# Altium PCB Dc-Dc Converters.PcbDoc
Units mil, origin at the board's own origin, x right, y up, seen from the top; angles counter-clockwise.
Board outline 3935.26 x 1377.95 mil, 4 copper layers (Top Layer, GND, Vin/Vout, Bottom Layer), stack 23.756 mil thick; 30 components, 12 nets, 70 pads, 91 vias.
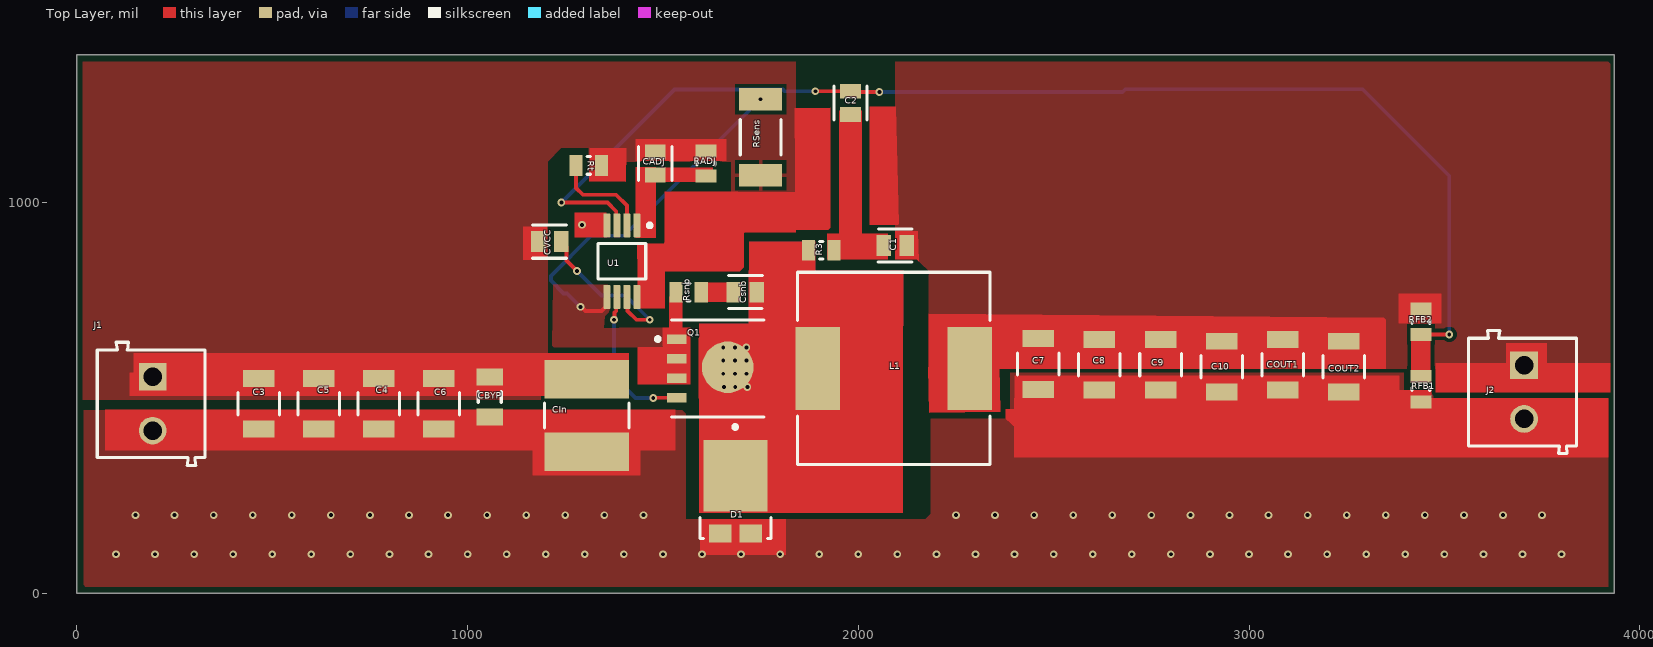
[diagram p0: Top Layer view]
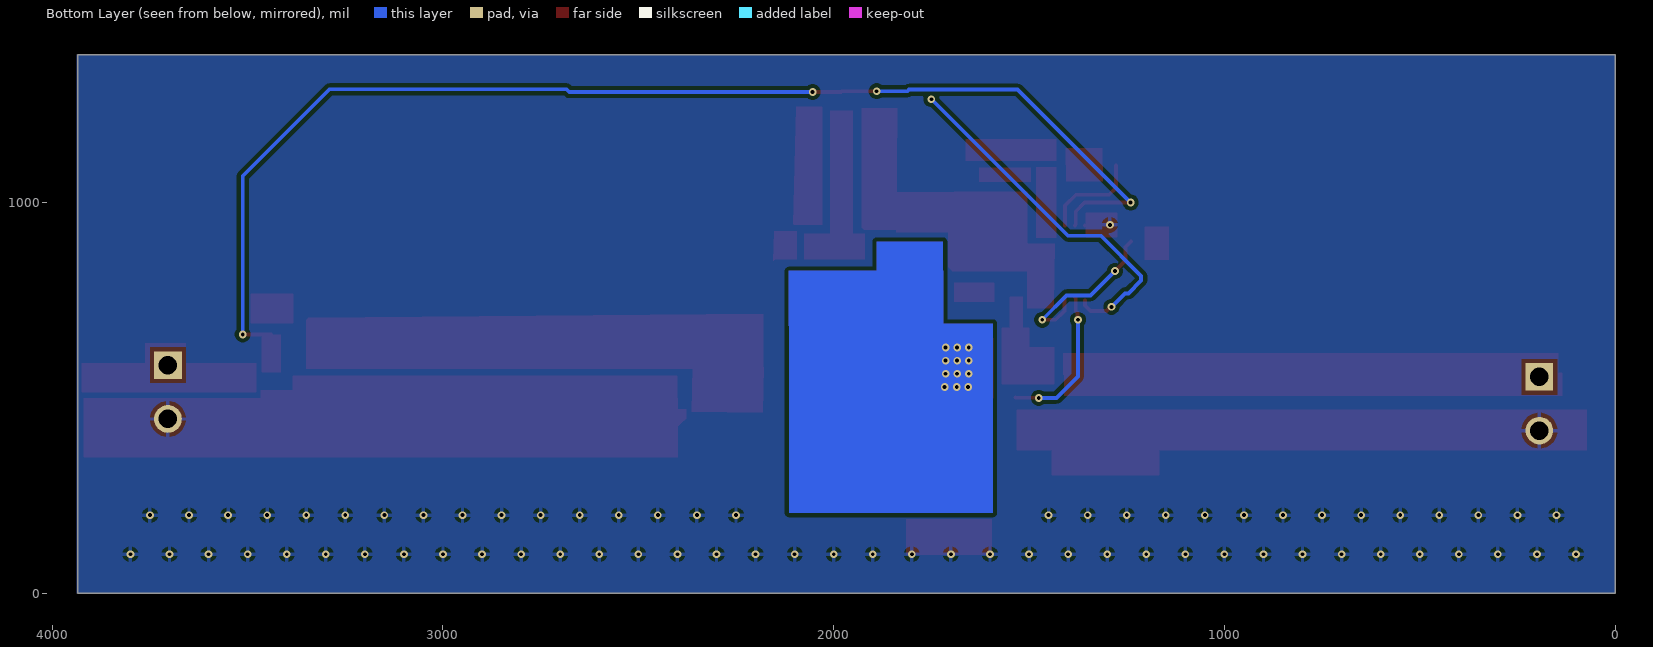
[diagram p1: Bottom Layer view, seen from below]
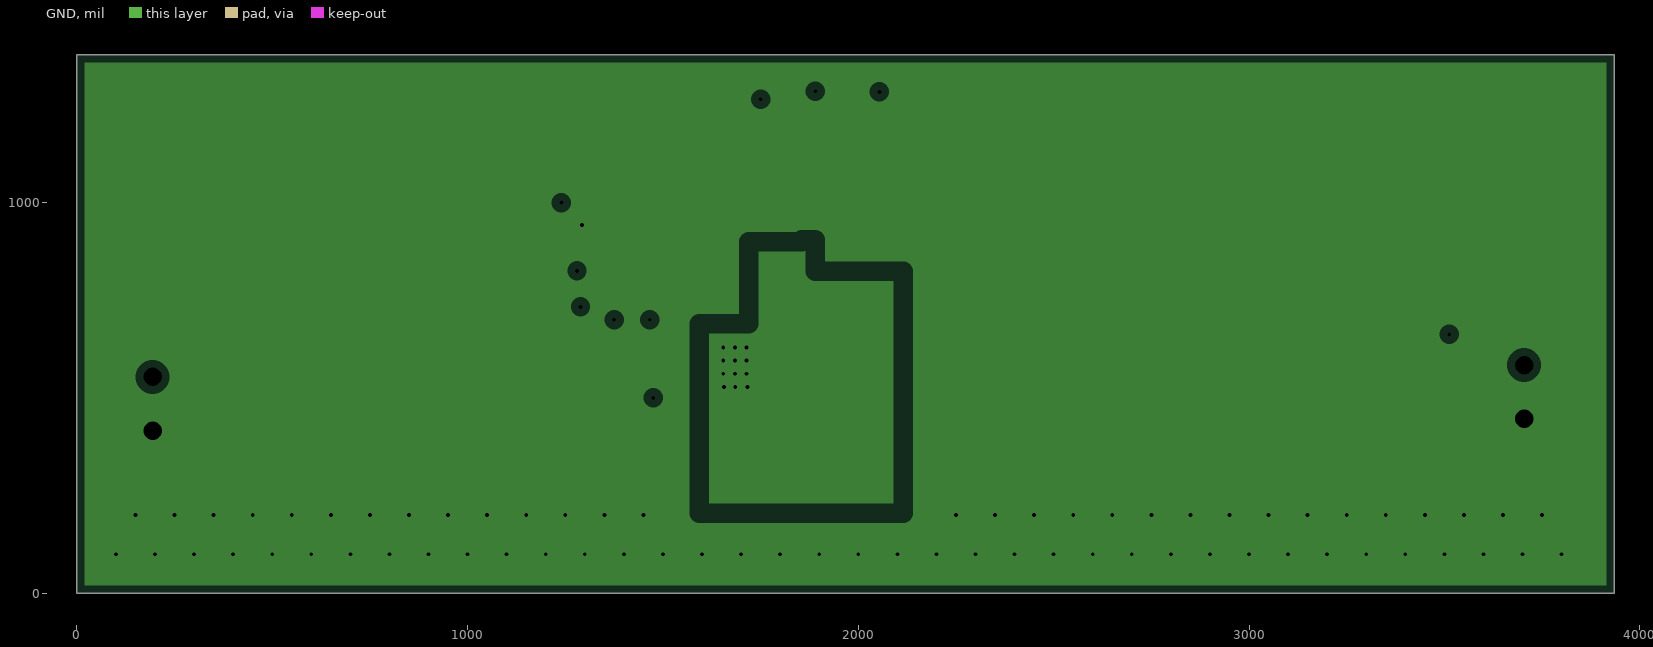
[diagram p2: GND, clearances drawn from the general rule]
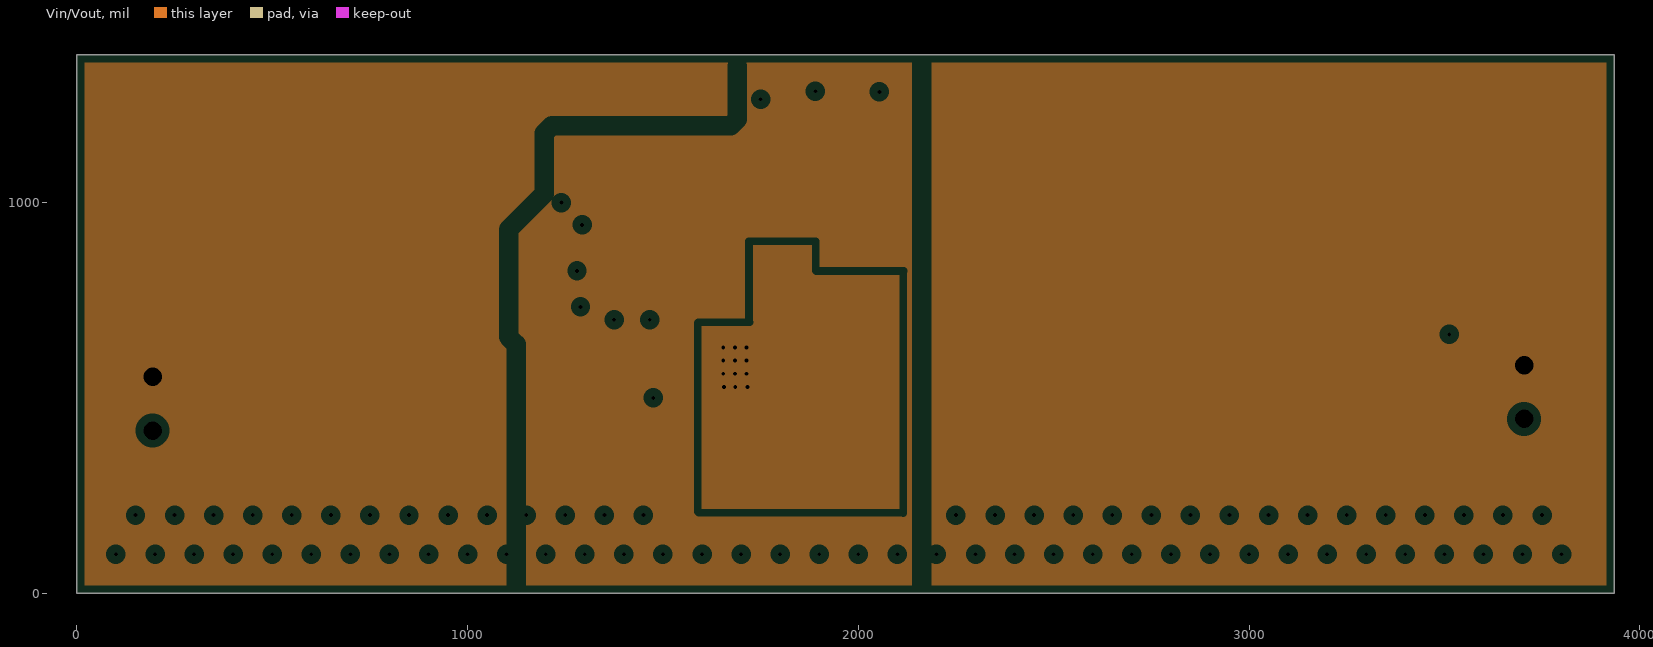
[diagram p3: Vin/Vout, clearances drawn from the general rule]
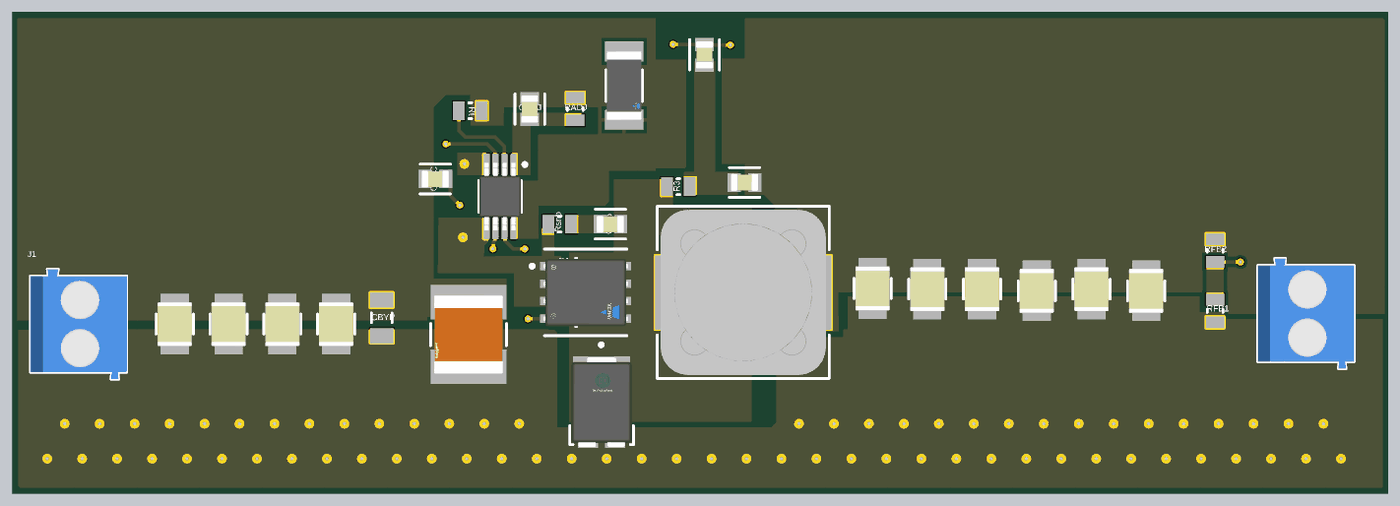
[diagram p4: 3D render of the assembled board from above, using the file's embedded part models]

## Layer stack, top to bottom
Top Solder: solder mask 0.4, Solder Resist, Dk 3.5
Top Layer: signal copper 1.4
Dielectric 2: prepreg 2.8, PP-006, Dk 4.1
GND: plane copper 1.378, net GND
Dielectric 1: dielectric 12.6, FR-4, Dk 4.8
Vin/Vout: plane copper 1.378, net (Multiple Nets)
Dielectric 3: prepreg 2.8, PP-006, Dk 4.1
Bottom Layer: signal copper 1.4
Bottom Solder: solder mask 0.4, Solder Resist, Dk 3.5

## Board outline
0,0 3935.26,0 3935.26,1377.95 0,1377.95

## Design rules (kind name [scope] priority, off if disabled: settings)
Clearance [All] p1: gap=10 ignorepadtopadclearanceinfootprint=TRUE except(0: Arc-Hole Track-Hole SMDPad-Hole THPad-Hole Via-Hole Fill-Hole Poly-Hole Region-Hole Text-Hole)
PlaneClearance [All] p1: clearance=20
PlaneConnect [All] p1: planeconnectstyle=Relief reliefexpansion=20 reliefentries=4 reliefconductorwidth=10 reliefairgap=10
PolygonConnect PolygonConnect_2 [All vs IsNamedPolygon('GND_L01_P005')] p1: connectstyle=Direct reliefconductorwidth=10 reliefentries=4 polygonreliefangle="90 Angle" airgapwidth=10
PolygonConnect PolygonConnect_1 [All vs IsNamedPolygon('NETQ1_1_L01_P007')] p2: connectstyle=Direct reliefconductorwidth=10 reliefentries=4 polygonreliefangle="90 Angle" airgapwidth=10
PolygonConnect [All] p3: connectstyle=Relief reliefconductorwidth=10 reliefentries=4 polygonreliefangle="90 Angle" airgapwidth=10
RoutingVias [All] p1: holewidth=9.84 width=19.68 viastyle="Through Hole" minholewidth=9.84 minwidth=19.68 maxholewidth=9.84 maxwidth=19.68
SilkToSilkClearance [All] p1 off: silktosilkclearance=10
SilkToSolderMaskClearance [IsPad] p1 off: minsilkscreentomaskgap=10 clearancetoexposedcopper=TRUE
SolderMaskExpansion [All] p1: expansion=4 istentingtop=FALSE
UnRoutedNet [All] p1: checkbadconnections=TRUE
Width [All] p1: maxlimit=10 minlimit=10 preferedwidth=10
25 further rules are at their usual default settings.

## Components (designator, comment, footprint, x,y, rotation, side; value= is the part's Value field where it differs from the comment)
C1 "3300pF" FP-C0805C-DG-MFG 2094.53,890.08 r0 top value=1000pF
C2 "0.1uF" FP-C0805C-DG-MFG 1980,1255 r270 top value=1000pF
C3 ".22uF" FP-GRM32-0_3-MFG 465,485 r270 top value=100uF
C4 ".22uF" FP-GRM32-0_3-MFG 772.63,485 r270 top value=100uF
C5 ".22uF" FP-GRM32-0_3-MFG 618.81,485 r270 top value=100uF
C6 ".22uF" FP-GRM32-0_3-MFG 926.44,485 r270 top value=100uF
C7 "100uF" FP-GRM32-0_3-MFG 2460.63,586.93 r270 top
C8 "100uF" FP-GRM32-0_3-MFG 2617.07,585 r270 top
C9 "100uF" FP-GRM32-0_3-MFG 2773.52,585 r270 top
C10 "100uf" FP-GRM32-0_3-MFG 2929.96,580 r270 top value=100uF
CADJ "1000pF" FP-C0805C-DG-MFG 1480,1100 r90 top
CBYP "C1206C105K5RACTU" CAPC3216X110X50LL20T25 1056.7,502.65 r90 top
CIn "68uF" FP-GRM55D-0_4-IPC_A 1305,455 r270 top
COUT1 "C3225X5R0J476M250AA" FP-GRM32-0_3-MFG 3086.4,585 r270 top value=47uF
COUT2 "C3225X5R0J476M250AA" FP-GRM32-0_3-MFG 3242.85,580 r270 top value=47uF
Csnb "1000pF" FP-C0805C-DG-MFG 1710.63,770.63 r180 top
CVCC "0.47uF" FP-C0805C-DG-MFG 1210,900 r0 top
D1 "MBR1560STR" FP-340BQ-MFG 1685.63,261.26 r270 top value=550pF
J1 "691103110002" 691103110002 190,485 r270 top
J2 "691103110002" 691103110002 3700,515 r270 top
L1 "7447709150" WE-PD-XXL 2090.63,575.63 r0 top
Q1 "SI7465DP-T1-E3" FP-S17-0173-SINGLE-MFG 1640.22,575.63 r0 top
R3 "23.2k" RESC2013X50X30LL20T20 1905,877.96 r180 top
RADJ "2.1k" RESC2013X50X30LL20T20 1610,1100 r270 top
RFB1 "3.4k" RESC2013X50X30LL20T20 3440,522.52 r90 top
RFB2 "10k" RESC2013X50X30LL20T20 3440,695 r270 top
RSens "0.01" FP-CRCW2010-e3-MFG 1750,1167 r270 top
Rsnb "10" RESC2013X50X30LL20T20 1565.63,770.63 r0 top
Rt "91k" RESC2013X50X30LL20T20 1310,1095 r0 top
U1 "LM25085MME/NOPB" DGK0008A_M 1395,850 r270 top

## Footprints (in the part's own frame and the unit in brackets; to place one, negate y for a bottom-side part, rotate by r counter-clockwise, add the part's x,y. Pads: shape width x height; smd on the part's side, far side on the other; paste and mask are expansions set on the pad)
691103110002 [mm] "3,50mm - modular - blue - Horizontal wire entry - Pressure clamp - 8,4mm height - 02p"
  rect 1.8x1.8 hole 1.2: 1(-1.75,0.1)
  round 1.8 hole 1.2: 2(1.75,0.1)
  silkscreen extent -4,-3.5 4,3.5, body extent -4,-3.5 4,3.5, height 8.45
CAPC3216X110X50LL20T25 [mm] "Chip Capacitor, 2-Leads, Body 3.20x1.60mm, IPC High Density"
  rect 1.1x1.7 smd: 1(-1.3,0) 2(1.3,0)
  silkscreen extent -0.35,-0.75 0.35,0.75, body extent -1.7,-0.9 1.7,0.9, height 1.1
DGK0008A_M [mm] "TSOP, 8-Leads, Body 3.1x3.1mm, Pitch 0.65mm, IPC Low Density"
  rrect22% 1.55x0.45 smd: 1(-2.325,0.975) 2(-2.325,0.325) 3(-2.325,-0.325) 4(-2.325,-0.975) 5(2.325,-0.975) 6(2.325,-0.325) 7(2.325,0.325) 8(2.325,0.975)
  silkscreen extent -2.45,-1.55 1.15,1.92, body extent -2.45,-1.5 2.45,1.5, height 0.94
FP-340BQ-MFG [mm]
  rect 1.15x1.45 smd paste+0 mask+0: 1(2.75,0.985) 2(2.75,-0.985)
  rect 4.65x4.15 smd paste+0 mask+0: 3(-1,0)
  silkscreen extent -4.3,-2.31 3.08,2.31, body extent -3.42,-2.41 3.42,2.41, height 0.25
FP-C0805C-DG-MFG [mm]
  rect 0.95x1.35 smd paste+0 mask+0: 1(-0.75,0) 2(0.75,0)
  silkscreen extent -1.11,-1.08 1.1,1.07, body extent -1.4,-0.85 1.4,0.85, height 0.25
FP-CRCW2010-e3-MFG [mm]
  rect 1.45x2.8 smd paste+0 mask+0: 1(-2.475,0) 2(2.475,0)
  silkscreen extent -1.14,-1.33 1.14,1.33, body extent -3.3,-1.5 3.3,1.5, height 0.25
FP-GRM32-0_3-MFG [mm]
  rect 1.1x2.05 smd paste+0 mask+0: 1(-1.65,0) 2(1.65,0)
  silkscreen extent -0.72,-1.35 0.72,1.35, body extent -2.3,-1.45 2.3,1.45, height 0.25
FP-GRM55D-0_4-IPC_A [mil]
  rect 98.51x216.66 smd paste+0 mask+0: 1(-92.54,0) 2(92.54,0)
  silkscreen extent -31,-108 31,108, body extent -161,-128 161,128, height 10
FP-S17-0173-SINGLE-MFG [mm]
  rect 1.27x0.61 smd paste+0 mask+0: 1(-2.67,1.905) 2(-2.67,0.635) 3(-2.67,-0.635) 4(-2.67,-1.905)
  round 3.356 smd paste+0 mask+0: 5-6-7-8(0.645,0.069)
  Top Layer region: -1.219,1.956 2.286,1.956 2.286,2.21 3.302,2.21 3.302,1.6 2.591,1.6 2.591,0.94 3.302,0.94 3.302,0.33 2.591,0.33 2.591,-0.33 3.302,-0.33 3.302,-0.94 2.591,-0.94 2.591,-1.6 3.302,-1.6 3.302,-2.21 2.286,-2.21 2.286,-1.956 -1.219,-1.956
  silkscreen extent -4.02,-3.15 3,3.15, body extent -3.4,-2.73 3.4,2.73, height 0.25
RESC2013X50X30LL20T20 [mm] "Chip Resistor, 2-Leads, Body 2.00x1.25mm, IPC High Density"
  rect 0.85x1.35 smd: 1(-0.825,0) 2(0.825,0)
  silkscreen extent -0.1,-0.58 0.1,0.58, body extent -1.1,-0.72 1.1,0.72, height 0.5
WE-PD-XXL [mm] "SMD Inductor, 2-Leads, Body 12.0 x 12.0 mm"
  rect 2.9x5.4 smd: 1(-4.95,0) 2(4.95,0)
  silkscreen extent -6.25,-6.25 6.25,6.25, body extent -6,-6 6,6, height 10.36

## Part data
C1 C2: library part CMP-2007-03243-2, "CAP CER 10UF 10V X5R 0805", 3DS Part Number=220-00001, Capacitance=1000pF, Manufacturer=Kemet, Manufacturer Part Number=C0805C106K8PACTU, Package=C0805C-DG, Temperature="-55°C to +85°C", Temperature Characteristic=X5R, Temperature Coefficient=15%, Temperature Range High=+85°C, Temperature Range Low=-55°C, Tolerance=10%, Voltage=10V, Automotive=No, Category=Cap, ComponentLink2Description=Datasheet, ComponentLink2URL=https://content.kemet.com/datasheets/KEM_C1006_X5R_SMD.pdf, Device Class L1="Passive Components", Device Class L2=Capacitors, Device Class L3="Ceramic Capacitors", Digikey Description="CAP CER 10UF 10V X5R 0805", Height=1.4mm, Ipc Land Pattern Name=CAPC200125X125, Lead Free=Yes, Material=Ceramic, Mouser Description="CAP CER 10UF 10V X5R 0805", Octopart=https://octopart.com/c0805c106k8pactu-kemet-98697, RoHS=TRUE, Voltage Rating=10V
C3 C4 C5 C6 C10: library part CMP-2000-05259-2, "CAP CER 100UF 6.3V X5R 1210", 3DS Part Number=220-00002, Capacitance=100uF, Manufacturer=Murata, Manufacturer Part Number=GRM32ER60J107ME20L, Package=GRM32-0.3, Temperature="-55°C to +85°C", Temperature Characteristic=X5R, Temperature Coefficient=15%, Temperature Range High=+85°C, Temperature Range Low=-55°C, Tolerance=20%, Voltage=6.3V, Automotive=No, Category=Cap, ComponentLink2Description=Datasheet, ComponentLink2URL=https://search.murata.co.jp/Ceramy/image/img/A01X/G101/ENG/GRM32ER60J107ME20-01.pdf, Device Class L1="Passive Components", Device Class L2=Capacitors, Device Class L3="Ceramic Capacitors", Digikey Description="CAP CER 100UF 6.3V X5R 1210", Height=2.7mm, Ipc Land Pattern Name=CAPC320250X250, Lead Free=Yes, Material=Ceramic, Octopart=https://octopart.com/grm32er60j107me20l-murata-197007, RoHS=TRUE, Voltage Rating=6.3V
C7 C8 C9: library part CMP-2000-05259-2, "CAP CER 100UF 6.3V X5R 1210", 3DS Part Number=220-00002, Manufacturer=Murata, Manufacturer Part Number=GRM32ER60J107ME20L, Package=GRM32-0.3, Temperature="-55°C to +85°C", Temperature Characteristic=X5R, Temperature Coefficient=15%, Temperature Range High=+85°C, Temperature Range Low=-55°C, Tolerance=20%, Voltage=6.3V, Automotive=No, Capacitance=100uF, Category=Cap, ComponentLink2Description=Datasheet, ComponentLink2URL=https://search.murata.co.jp/Ceramy/image/img/A01X/G101/ENG/GRM32ER60J107ME20-01.pdf, Device Class L1="Passive Components", Device Class L2=Capacitors, Device Class L3="Ceramic Capacitors", Digikey Description="CAP CER 100UF 6.3V X5R 1210", Height=2.7mm, Ipc Land Pattern Name=CAPC320250X250, Lead Free=Yes, Material=Ceramic, Octopart=https://octopart.com/grm32er60j107me20l-murata-197007, RoHS=TRUE, Voltage Rating=6.3V
CADJ Csnb CVCC: library part CMP-2007-03243-2, "CAP CER 10UF 10V X5R 0805", 3DS Part Number=220-00001, Manufacturer=Kemet, Manufacturer Part Number=C0805C106K8PACTU, Package=C0805C-DG, Temperature="-55°C to +85°C", Temperature Characteristic=X5R, Temperature Coefficient=15%, Temperature Range High=+85°C, Temperature Range Low=-55°C, Tolerance=10%, Voltage=10V, Automotive=No, Category=Cap, ComponentLink2Description=Datasheet, ComponentLink2URL=https://content.kemet.com/datasheets/KEM_C1006_X5R_SMD.pdf, Device Class L1="Passive Components", Device Class L2=Capacitors, Device Class L3="Ceramic Capacitors", Digikey Description="CAP CER 10UF 10V X5R 0805", Height=1.4mm, Ipc Land Pattern Name=CAPC200125X125, Lead Free=Yes, Material=Ceramic, Mouser Description="CAP CER 10UF 10V X5R 0805", Octopart=https://octopart.com/c0805c106k8pactu-kemet-98697, RoHS=TRUE, Voltage Rating=10V
  CADJ Csnb: Capacitance=1000pF
  CVCC: Capacitance=0.47uF
CBYP: library part CMP-2000-06011-1, "Chip Capacitor, 1 uF, +/- 10%, 50 V, -55 to 125 degC, 1206 (3216 Metric), RoHS, Tape and Reel", Capacitance=1uF, Capacitance - nF=1000nF, Case Code - in=1206, Case Code - mm=3216, Case Height=1mm, Case Length=3.2mm, Case Width=1.6mm, Dielectric=X7R, Manufacturer=Kemet, Maximum Operating Temperature=+125C, Minimum Operating Temperature=-55C, Operating Temperature Range=-55Cto+125C, Package / Case=1206(3216metric), Package Description="2-Pin Surface Mount Device, Body 3.2 x 1.6 mm", Temperature Coefficient / Code=+/-15%, Tolerance=10%, Voltage Rating=50V, Brand=Kemet, Class=Class1, Datasheet URL=http://www.kemet.com/docfinder?Partnumber=C1206C105K5RACTU, Datasheet Version=02/2016, Dimensions=1.6mmWx3.2mmLx1mmH, Factory Pack Quantity=2500, Manufacturer URL=http://www.kemet.com/, Mounting Technology=SurfaceMount, Package Reference=1206, Packaging=Reel, Product=GeneralTypeMLCCs, Product Category=MultilayerCeramicCapacitorsMLCC-SMD/SMT, RoHS=Details, Series=C1206C, Termination Style=SMD/SMT, Type=SMDMLCCX7R6.3-250VDCCommericalGrade, Voltage Rating DC=50V
CIn: library part CMP-2000-06370-2, "100V 2020 pack", Case Code (Imperial)=2220, Case Code (Metric)=5750, Dielectric=X7R, Max Operating Temperature=125°C, Min Operating Temperature=-55°C, Package Quantity=1, Tolerance=10%, Voltage=250V, Capacitance=68uF, Case/Package=2220, Depth=5mm, Height=2mm, Lead Free="Lead Free", Length=5.7mm, Material=Ceramic, Mount="Surface Mount", Number of Pins=2, Packaging="Tape and Reel", REACH SVHC="No SVHC", Termination=SMD/SMT, Thickness=0.087inch, Voltage Rating=250V, Voltage Rating (DC)=250V, Width=5mm
COUT1 COUT2: library part CMP-2000-05259-2, "CAP CER 100UF 6.3V X5R 1210", 3DS Part Number=220-00002, Capacitance=47uF, Manufacturer=Murata, Manufacturer Part Number=GRM32ER60J107ME20L, Package=GRM32-0.3, Temperature="-55°C to +85°C", Temperature Characteristic=X5R, Temperature Coefficient=15%, Temperature Range High=+85°C, Temperature Range Low=-55°C, Tolerance=20%, Voltage=6.3V, Automotive=No, Category=Cap, ComponentLink2Description=Datasheet, ComponentLink2URL=https://search.murata.co.jp/Ceramy/image/img/A01X/G101/ENG/GRM32ER60J107ME20-01.pdf, Device Class L1="Passive Components", Device Class L2=Capacitors, Device Class L3="Ceramic Capacitors", Digikey Description="CAP CER 100UF 6.3V X5R 1210", Height=2.7mm, Ipc Land Pattern Name=CAPC320250X250, Lead Free=Yes, Material=Ceramic, Octopart=https://octopart.com/grm32er60j107me20l-murata-197007, RoHS=TRUE, Voltage Rating=6.3V
D1: library part CMP-07162-000018-1, "DIODE SCHOTTKY 60V 10A TO277-3", Capacitance=550pF, Forward Current=10A, Manufacturer="ON Semiconductor", Manufacturer Part Number=FSV1060V, Max Junction Temp=+150°C, Max Repetitive Reverse Voltage=60V, Max Surge Forward Current=280A, Package=340BQ, Peak Reverse Current=0.056mA, Temperature="-55°C to +150°C", Temperature Range Low=-55°C, Automotive=No, Category=Diode, ComponentLink2Description=Datasheet, ComponentLink2URL=https://www.onsemi.com/pub/Collateral/FSV1060V-D.pdf, Device Class L1="Discrete Semiconductors", Device Class L2=Diodes, Device Class L3="Schottky Diodes", Digikey Description="DIODE SCHOTTKY 60V 10A TO277-3", Footprint Url=https://www.onsemi.com/pub/Collateral/340BQ.PDF, Height=1.2mm, Lead Free=Yes, Mouser Description="Schottky Diodes & Rectifiers Schottky", Octopart=https://octopart.com/fsv1060v-on+semiconductor-84328651, Reverse Voltage=60V, RoHS=TRUE, Temperature Range High=+150°C
J1 J2: library part CMP-1502-03254-1, "Series 1031 - 3.50 mm Horizontal Entry Modular with Pressure Clamp WR-TBL, 2 pin", Manufacturer="Wurth Elektronik", Operating Temperature=-40to105degC, Datasheet URL=http://katalog.we-online.de/em/datasheet/6911031100xx.pdf, Manufacturer URL=http://www.we-online.de, Mounting Technology=THT, Package Reference=691103110002, Packaging=Box, Part Number=691103110002, Pin Number=2, Pitch=3.50mm, Publisher=WurthElektronik
L1: library part CMP-0227-00106-1, "SMD-Shielded Power Inductor WE-PD, L = 15.0 µH", Inductance="15.0 ÂµH", ComponentLink1Description="Manufacturer Link", ComponentLink1URL=http://www.we-online.com, ComponentLink2Description=Datasheet, ComponentLink2URL=http://www.we-online.de/katalog/media/pdf/7447709150.pdf, DatasheetVersion="ver 4, Oct-2006", PackageDescription="SMD Inductor, 2-Leads, Body 12.0 x 12.0 mm", PackageReference=WE-PD-XXL, PackageVersion=2004
Q1: library part CMP-2000-07061-2, "MOSFET P-CH 60V 3.2A PPAK SO-8", Continuous Drain Current=-36.5A, Drain to Source Breakdown Voltage=-30V, Drain to Source Resistance=0.0021Ω, Gate To Source Voltage=20V, Input Capacitace At Vds="15660pF @ -15V", Manufacturer=Vishay, Max Forward Diode Voltage=-1.1V, Max Junction Temp=+150°C, Package=S17-0173-SINGLE, Power Dissipation=6.25W, Pulse Drain Current=-100A, Temperature="-55°C to +150°C", Temperature Range Low=-55°C, Typ Forward Diode Voltage=-0.69V, Automotive=No, Category=Trans, ComponentLink2Description=Datasheet, ComponentLink2URL=http://www.vishay.com/docs/64814/si7145dp.pdf, Depletion Mode=False, Device Class L1="Discrete Semiconductors", Device Class L2=Transistors, Device Class L3=MOSFETs, Digikey Description="MOSFET P-CH 30V 60A PPAK SO-8", Drain To Source Voltage=-30V, Gate Charge At Vgs="275nC @ -10V", Height=1.17mm, Lead Free=Yes, Manufacturer Part Number=SI7465DP-T1-E3, Mouser Description="Single P-Channel 30 V 2.6 mOhms Surface Mount Power Mosfet - PowerPAK SO-8", Number Of Channels=1, Number Of P Channels=1, Octopart=https://octopart.com/si7145dp-t1-ge3-vishay-42623172, Reverse Recovery Charge=44nC, Reverse Recovery Time=42ns, RoHS=TRUE, Rthja Max=15°C/W, Standoff Height=0mm, Temperature Range High=+150°C, Threshold Vgs Max=-2.3V, Threshold Vgs Min=-1V, Transconductance=110S, Turn Off Delay Time=130ns, Turn On Delay Time=27ns
R3 RADJ RFB1 RFB2 Rsnb Rt: library part CMP-2001-04896-1, Manufacturer="Vishay Dale", Part Number=CRCW08050000Z0EA
RSens: library part CMP-02407-004721-1, "RES Thick Film, 49.9Ω, 1%, 0.75W, 100ppm/°C, 2010", Case Code (Imperial)=2010, Case Code (Metric)=5025, Max Operating Temperature=155°C, Max Power Dissipation=750mW, Min Operating Temperature=-55°C, Package Quantity=4000, Resistance=49.9R, Temperature Coefficient=100ppm/°C, Tolerance=1%, Voltage Rating=400V, Case/Package=2010, Composition="Thick Film", Contact Plating=Tin, Depth=2.5mm, Features="Automotive AEC-Q200", Height=0.028inch, Lead Free="Lead Free", Length=5mm, Military Standard=Not, Number of Terminations=2, Packaging="Tape and Reel", Power Rating=750mW, Radiation Hardening=No, Termination=SMD/SMT, Voltage Rating (DC)=400V, Weight=0.000899oz, Width=2.5mm
U1: library part CMP-0063-01326-3, "42V Constant On-Time PFET Buck Switching Controller, 8-pin MSOP, Pb-Free", Manufacturer="Texas Instruments", PackageTopMarking=ZXTT*SVZB, PowerWise=Y, Code_JEDEC=MO-187-AA, ComponentLink1Description="Datasheet URL", ComponentLink1URL=http://www.ti.com/general/docs/lit/getliterature.tsp?genericPartNumber=LM25085&fileType=pdf, CompType=MiscPower, PackageDescription="MINI SOIC, .118 x .118 x .034in, 8 Lead, .0256in Pitch", PackageReference=DGK0008A, PinCount=8, RoHS=Y

## Via types
v1: diameter 19.68, hole 9.84, Top Layer to Bottom Layer, 91 vias

## Nets (pads, with @x,y where several pads share a name; then routed paths per layer and width w, separated by ;. In a path a pad name is that pad's centre, name@x,y a point inside that pad or via, vN(x,y) a via of type N, cw(c..) or ccw(c..) an arc to the next point about the centre after c; other vN are vias at no path point)
+5: C1.2 C7.1 C8.1 C9.1 C10.1 COUT1.1 COUT2.1 J2.1 L1.2 RFB2.1
+12: C3.1 C4.1 C5.1 C6.1 CADJ.2 CBYP.2 CIn.1 CVCC.1 J1.1 RADJ.1 RSens.2 Rt.2 U1.8
GND: C3.2 C4.2 C5.2 C6.2 C7.2 C8.2 C9.2 C10.2 CBYP.1 CIn.2 COUT1.2 COUT2.2 D1.1 D1.2 J1.2 J2.2 RFB1.1 U1.4 | length 64.2
  Top Layer w10: v1(1293,943) 1313.69,943 1315.16,941.54 U1.4
  other v1: 100,100 200,100 300,100 400,100 500,100 600,100 700,100 800,100 900,100 1000,100 1100,100 1200,100 1300,100 1400,100 1500,100 1600,100 1700,100 1800,100 1900,100 2000,100 2100,100 2200,100 2300,100 2400,100 2500,100 2600,100 2700,100 2800,100 2900,100 3000,100 3100,100 3200,100 3300,100 3400,100 3500,100 3600,100 3700,100 3800,100 150,200 250,200 350,200 450,200 550,200 650,200 750,200 850,200 950,200 1050,200 1150,200 1250,200 1350,200 1450,200 2250,200 2350,200 2450,200 2550,200 2650,200 2750,200 2850,200 2950,200 3050,200 3150,200 3250,200 3350,200 3450,200 3550,200 3650,200 3750,200
NetC1_1: C1.1 C2.2 R3.1
NetC2_1: C2.1 RFB1.2 RFB2.2 U1.3 | length 3153.7
  Top Layer w10: v1(1240,1000) 1357.59,1000 1380.47,977.12 1380.47,943.27 U1.3 ; v1(1890,1285) 1979.53,1285 1981.53,1283 v1(2054,1283) ; RFB2.2 v1(3512.52,662.52)
  Bottom Layer w10: v1(1240,1000) 1529.28,1289.28 1806.76,1289.28 1811.04,1285 v1(1890,1285) ; v1(2054,1283) 2676.81,1283 2683.81,1290 3290,1290 3512.52,1067.48 v1(3512.52,662.52)
NetCADJ_1: CADJ.1 RADJ.2 U1.1
NetCsnb_1: Csnb.1 D1.3 L1.1 Q1.5-6-7-8 R3.2 | length 40
  Top Layer w10: D1.3@1664,279 D1.3 ; Q1.5-6-7-8@1665.63,568.9 Q1.5-6-7-8
  other v1: 1656,528 1685,528 1716,528 1654.49,561.75 1683.98,561.75 1713.48,561.75 1654.49,595.5 1683.98,595.5 1713.48,595.5 1654.49,629.25 1683.98,629.25 1713.48,629.25
NetCsnb_2: Csnb.2 Rsnb.2
NetCVCC_2: CVCC.2 U1.7 | length 436.1
  Top Layer w10: CVCC.2 1253.23,886.3 1253.23,851.77 v1(1280,825) ; U1.7 1409.53,756.73 1409.53,722.88 1432.41,700 v1(1466.26,700) v1@1470,700
  Bottom Layer w10: v1(1280,825) 1342.5,762.5 1403.76,762.5 v1(1466.26,700)
NetQ1_1: Q1.1 Q1.2 Q1.3 RSens.1 Rsnb.1 U1.5 | length 929.9
  Top Layer w10: v1(1289,733) 1291.62,733 1301.77,722.85 1342.66,722.85 1356.61,736.81 U1.5@1356.61,748.97
  Bottom Layer w10: v1(1289,733) 1254.57,767.43 1245.57,767.43 1213,800 1213,812 1316,915 1400.56,915 v1(1750,1264.44)
NetQ1_4: Q1.4 U1.6 | length 389.7
  Top Layer w10: v1(1374.84,700.01) 1376.28,701.45 1376.28,718.69 1380.47,722.88 1380.47,756.73 U1.6 ; v1(1475,500) 1475.32,500.31 1534.79,500.31 Q1.4
  Bottom Layer w10: v1(1374.84,700.01) 1374.84,555.16 1430,500 v1(1475,500)
NetRt_1: Rt.1 U1.2 | length 257.2
  Top Layer w10: Rt.1 1277.52,1037.48 1295,1020 1380,1020 1407.8,992.2 U1.2

## Polygon pours and split planes (outlines as drawn)
NetQ1_1 on Top Layer "NETQ1_1_L01_P007" (solid, remove dead copper, pour order 7): 1218.99,790 1372,790 1372,730 1351,709 1349,679 1375,678 1388,680 1500,680 1500,635 1505,630 1216.99,630
+12 on Top Layer "+12_L01_P003" (solid, pour order 3): 1840,1360 1840,970 1680,970 1675,975 1675,1105 1315,1105 1310,1110 1310,1140 1240,1140 1205,1105 1205.39,702.05 1205,505 1195,495 15,495 15,1360
+5 on Top Layer "+5_L01_P000" (solid, pour order 0): 2095,1360 3920,1360 3925,1355 3925,575 3920,580 3915,575 2180,575 2180,815 2185,820 2095,910
GND on Top Layer "GND_L01_P005" (solid, pour order 5): 3924,495 3923,496 3472,496 3472,507 3462,517 3396,517 3396,566 3395,567 2389,567 2389,459 2377,447 2185,447 2185,204 2171,190 1558,190 1558,460 1550,468 17,468 17,22 22,17 3920,17 3920,495
GND on Bottom Layer "GND_L04_P006" (solid, pour order 6): 0,0 0,1377.95 3937.01,1377.95 3937.01,0
NetCsnb_1 on Vin/Vout (split plane): 1881.07,826 1881.41,823.43 1882.4,821.04 1883.98,818.98 1884.98,817.98 1887.04,816.4 1889.43,815.41 1892,815.07 2105.07,815.07 2105.07,215.93 1598.93,215.93 1598.93,684.07 1722,684.07 1724.57,684.41 1726.96,685.4 1729.02,686.98 1730.6,689.04 1731.59,691.43 1731.93,694 1731.59,696.57 1730.6,698.96 1729.93,699.84 1729.93,891.07 1881.07,891.07
+5 on Vin/Vout (split plane): 3915.16,20.1 2186.9,20.1 2186.9,1357.86 3915.16,1357.86
+12 on Vin/Vout (split plane): 1666.15,1356.75 1665.23,1352.92 1664.92,1349 1664.92,1223.39 1663.61,1222.08 1216,1222.08 1212.08,1221.77 1211.16,1221.55 1208.25,1220.85 1206.12,1219.97 1204.62,1219.34 1201.26,1217.29 1198.27,1214.73 1178.27,1194.73 1175.71,1191.74 1173.66,1188.38 1172.15,1184.75 1171.23,1180.92 1170.92,1177 1170.92,1032.39 1087.27,948.73 1084.71,945.74 1082.66,942.38 1081.15,938.75 1080.23,934.92 1079.92,931 1079.92,656 1080.23,652.08 1081.15,648.25 1082.66,644.62 1084.71,641.26 1087.27,638.27 1098.92,626.61 1098.92,20.1 20.1,20.1 20.1,1357.86 1666.61,1357.86
no net on Vin/Vout (split plane): 2136.75,20.1 1149.08,20.1 1149.08,637 1148.77,640.92 1148.55,641.84 1147.85,644.75 1146.97,646.88 1146.34,648.38 1145.08,650.44 1144.29,651.74 1141.73,654.73 1130.08,666.39 1130.08,920.61 1213.73,1004.27 1216.29,1007.26 1218.34,1010.62 1219.85,1014.25 1220.77,1018.08 1221.08,1022 1221.08,1166.61 1226.39,1171.92 1674,1171.92 1677.92,1172.23 1681.75,1173.15 1685.38,1174.66 1688.74,1176.71 1691.73,1179.27 1707.73,1195.27 1710.29,1198.26 1712.34,1201.62 1713.85,1205.25 1714.77,1209.08 1715.08,1213 1715.08,1349 1714.77,1352.92 1713.85,1356.75 1713.39,1357.86 2136.75,1357.86
NetCsnb_1 on GND (split plane): 1864.91,824.87 1865.21,820.95 1866.13,817.12 1867.64,813.49 1869.7,810.13 1872.25,807.14 1872.35,807.04 1875.34,804.49 1878.69,802.43 1882.33,800.93 1886.16,800.01 1890.08,799.7 2089.77,799.7 2089.77,230.24 1617.48,230.24 1617.48,664.78 1719.77,664.78 1719.94,664.77 1723.86,665.07 1727.69,665.99 1731.33,667.5 1734.68,669.55 1737.67,672.11 1740.23,675.1 1742.29,678.46 1743.79,682.09 1744.71,685.92 1745.02,689.84 1745.02,874.92 1855.82,874.92 1859.74,875.23 1863.57,876.15 1864.91,876.71
GND on GND (split plane): 3915.16,20.1 20.1,20.1 20.1,1357.86 3915.16,1357.86

## Other copper
Top Layer:
  rectangle net NetC1_1: 1950,915 2010,1236
  rectangle net +12: 1430,1106 1663,1163
  rectangle net NetCsnb_2: 1589,745 1692,796
  rectangle net NetCsnb_1: 1592.22,205 2115,690
  rectangle net NetCsnb_1: 1720,790 1890,900
  rectangle net NetQ1_4: 1520,500.31 1534.79,502
  rectangle net GND: 1273.39,910 1355,975
  rectangle net GND: 1166,302 1443,380
  rectangle net GND: 72,365 1532,470
  rectangle net GND: 89,393 282,466
  rectangle net GND: 1595,98 1815,190
  rectangle net GND: 3381,496 3467,520
  rectangle net GND: 2398,348 3920,500
  rectangle net GND: 3392,463.31 3464,518
  rectangle net GND: 2400,444 3385,557
  rectangle net GND: 3609,382 3801,496
  region net +5: 2178.88,579.6 2180.92,460.85 2364,464 2361.96,582.75
  rectangle net +5: 3477,514 3925,588.9
  rectangle net +5: 3658,574 3763,641
  rectangle net +5: 3383,691 3493,767
  region net +12: 1310.97,1053.26 1405.51,1052.14 1406.56,1139.83 1312.02,1140.96
  rectangle net +12: 1142,853 1205,939
  rectangle net +12: 145,558.9 1413,615
  rectangle net +12: 135,505 1410,565
  rectangle net NetC2_1: 3415,565 3465,662.52
  rectangle net NetCADJ_1: 1495,1052 1628,1090
  rectangle net NetQ1_1: 1515,550.63 1550,760
  region net NetCsnb_1: 1720,685 1720,825 2115,825 2115,685
  region net +5: 2096,1245 2029,1245 2029,943 2101,943 2103,945
  region net +12: 1837,1242 1927,1242 1928,1243 1928,936 1923,931 1839.93,931
  region net GND: 2377,447 2377,470.5 2400.5,470.5 2406,482 2406,421
  region net GND: 3487,455 3485,457 3485,496 3389,496 3383,490 3383,455
  region net +12: 1437,736 1434,895 1502,895 1504,898 1504,899 1504,1028 1692,1028 1694,1026 1840,1026 1840,924 1709,924 1707,922 1707,834 1697,824 1525,824 1524,824 1523,824 1505,824 1505,768 1505,764 1505,760 1505,729 1437,729
  region net +5: 2095.35,926.65 2095,926.3 2095,855 2150,855 2155.33,849.67 2152.76,926.65
  region net +5: 2180,715 2180,575 3350,575 3350,700 3345,705
  region net NetC1_1: 1920,855 2075,855 2075,920 1920,920
  region net NetCADJ_1: 1430,910 1482,910 1482,1090 1430,1090
  region net NetQ1_1: 1500,535 1435,535 1435,630 1505,630
  region net NetQ1_1: 1500,680 1500,535 1570,535 1570,680
Bottom Layer:
  rectangle net NetCsnb_1: 1720,790 1890,900
  rectangle net NetCsnb_1: 1592.22,205 2115,690
  region net NetCsnb_1: 1720,685 1720,825 2115,825 2115,685
GND (plane layer: these items are gaps in the copper):
  lines w50: 1592.41,205.17 2114.85,205.17 ; 1592.41,205.17 1592.41,205.17 ; 1592.41,205.17 1592.41,689.81 1592.46,689.86 1719.93,689.86 ; 1719.93,689.86 1719.94,689.84 ; 1719.94,689.84 1719.94,899.94 1720.01,900.01 1851,900 1855.82,900 ; 1855.82,900 1855.82,900 ; 1855.82,900 1855.82,904.33 1855.83,904.31 1889.14,904.31 1889.04,904.21 1889.04,899.87 ; 1889.04,899.87 1889.07,899.84 ; 1889.07,899.84 1889.98,899.84 1889.98,824.87 1890.08,824.78 2114.85,824.78 2114.85,205.17 ; 2114.85,205.17 2114.85,205.17
Vin/Vout (plane layer: these items are gaps in the copper):
  lines w19.68: 1690,1349 1690,1371 ; 1589,209 1589,692 1591,694 1722,694 1720,696 1720,901 1891,901 1891,826 1892,825 2116,825 2115,824 2115,205 2114,206 1592,206 1589,209
  lines w50: 1124,6 1124,637 1105,656 1105,931 1196,1022 1196,1177 1216,1197 1674,1197 1690,1213 1690,1349 ; 2161.82,1.82 2161.82,1376.99